# EAGLE board untitled (EAGLE 6.1)
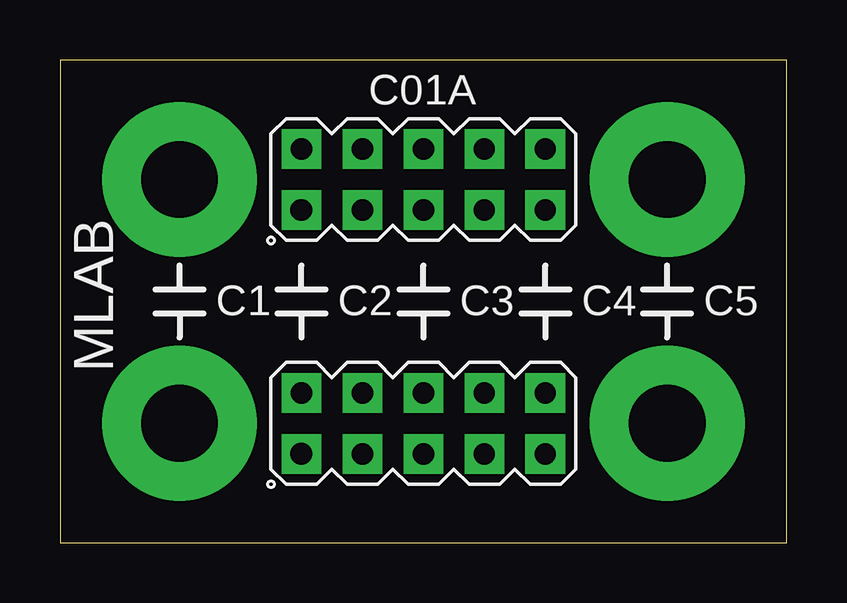
[diagram p0: board, top side]
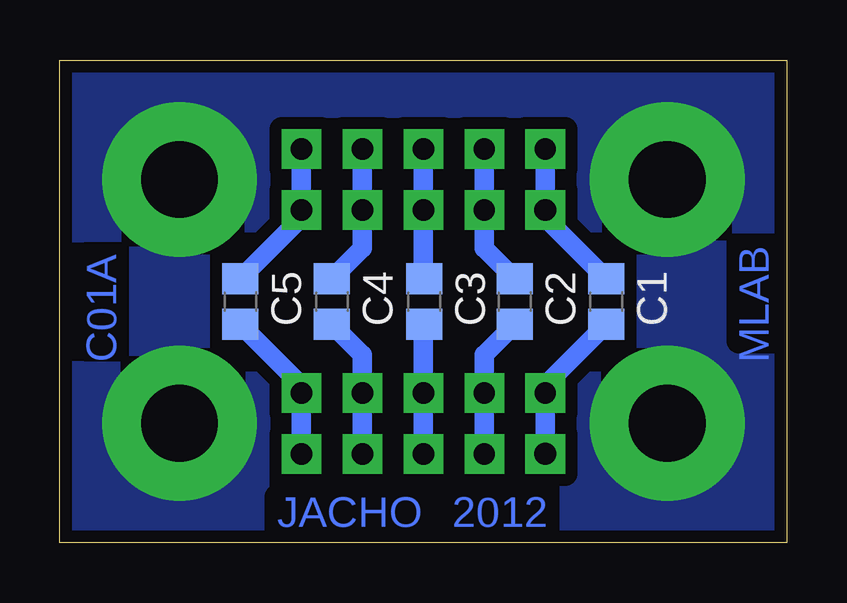
[diagram p1: board, bottom side, seen from below]

Size 30.28 x 20.12 mm. Coordinates in mm from the lower left corner, seen from the top.
Outline: 0,0 30.28,0 30.28,20.12 0,20.12 0,0
Copper layers (1*16): Top 0.035mm / dielectric 1mm / Bottom 0.035mm
Design rules: minimum track width 12mil, minimum drill 24mil, track to track 20mil, track to pad 20mil, pad to pad 20mil, via to via 20mil, smd to smd 8mil, copper to edge 20mil, drill to drill 70mil, minimum pad ring 10mil, minimum via ring 8mil, stop-mask expansion 5mil, vias tented up to drill 0mil, thermal gap 0mil

## Footprints (pad centres in the part's own frame; a part is rotated, then mirrored left to right if it is on the bottom)
C0805 = smd 1.3 x 1.5: 1 -0.95,0; 2 0.95,0
MA05-2 = drill 0.914 pad 1.651 square: 1 -5.08,-1.27 | drill 0.889 pad 1.651 square: 2 -5.08,1.27; 3 -2.54,-1.27; 4 -2.54,1.27; 5 0,-1.27; 6 0,1.27; 7 2.54,-1.27; 8 2.54,1.27; 9 5.08,-1.27; 10 5.08,1.27
SROUB3M = drill 3.2 pad 6.452: P$1 0,0

## Placement (x,y rotation side)
C1  [C0805]  7.52,10.06 270 bottom
C2  [C0805]  11.33,10.06 270 bottom
C3  [C0805]  15.1,10.06 270 bottom
C4  [C0805]  18.95,10.06 270 bottom
C5  [C0805]  22.76,10.06 270 bottom
SV1  [MA05-2]  15.14,15.14 0 top
SV2  [MA05-2]  15.14,4.98 0 top
X1  SROUB3M  [SROUB3M]  4.98,4.98 0 top
X2  SROUB3M  [SROUB3M]  25.3,4.98 0 top
X3  SROUB3M  [SROUB3M]  25.3,15.14 0 top
X4  SROUB3M  [SROUB3M]  4.98,15.14 0 top

## Library data of the parts
C1-C5 = moje_C
SV1 SV2 = moje_hrebinky; OC_FARNELL: unknown; OC_NEWARK: unknown
X1-X4 = moje

## Nets
GND: X1.P$1 X2.P$1 X3.P$1 X4.P$1
N$1: C1.2 SV2.1 SV2.2
N$2: C2.2 SV2.3 SV2.4
N$3: C3.2 SV2.5 SV2.6
N$4: C4.2 SV2.7 SV2.8
N$5: C1.1 SV1.1 SV1.2
N$6: C2.1 SV1.3 SV1.4
N$7: C3.1 SV1.5 SV1.6
N$8: C4.1 SV1.7 SV1.8
N$9: C5.2 SV2.9 SV2.10
N$10: C5.1 SV1.9 SV1.10

## Tracks (layer width: path | path; a pad name or v marks a point on that pad's centre or on a via)
GND
  pour Bottom: -0.1,20.22 -0.1,-0.1 30.38,-0.1 30.38,20.22
N$1
  Bottom 0.61: SV2.2 10.06,6.57
  Bottom 0.813: SV2.1 SV2.2 | 10.06,6.57 C1.2
N$2
  Bottom 0.813: SV2.3 SV2.4 12.6,7.84 C2.2
N$3
  Bottom 0.61: 15.14,9.07 C3.2
  Bottom 0.813: SV2.5 SV2.6 15.14,9.07
N$4
  Bottom 0.813: SV2.7 SV2.8 17.68,7.84 C4.2
N$5
  Bottom 0.61: SV1.1 10.06,13.55
  Bottom 0.813: SV1.2 SV1.1 | 10.06,13.55 C1.1
N$6
  Bottom 0.813: SV1.4 SV1.3 12.6,12.28 C2.1
N$7
  Bottom 0.61: 15.14,11.05 C3.1
  Bottom 0.813: SV1.6 SV1.5 15.14,11.05
N$8
  Bottom 0.813: SV1.8 SV1.7 17.68,12.28 C4.1
N$9
  Bottom 0.61: SV2.10 20.22,6.57
  Bottom 0.813: SV2.9 SV2.10 | 20.22,6.57 C5.2
N$10
  Bottom 0.61: SV1.9 20.22,13.55
  Bottom 0.813: SV1.10 SV1.9 | 20.22,13.55 C5.1

## Text on the board
Bottom: MLAB | C01A | 2012 | JACHO
tPlace: C01A | C1 | C2 | C3 | C4 | C5 | MLAB